# EAGLE board comb (EAGLE 9.6.2), part 1 of 2
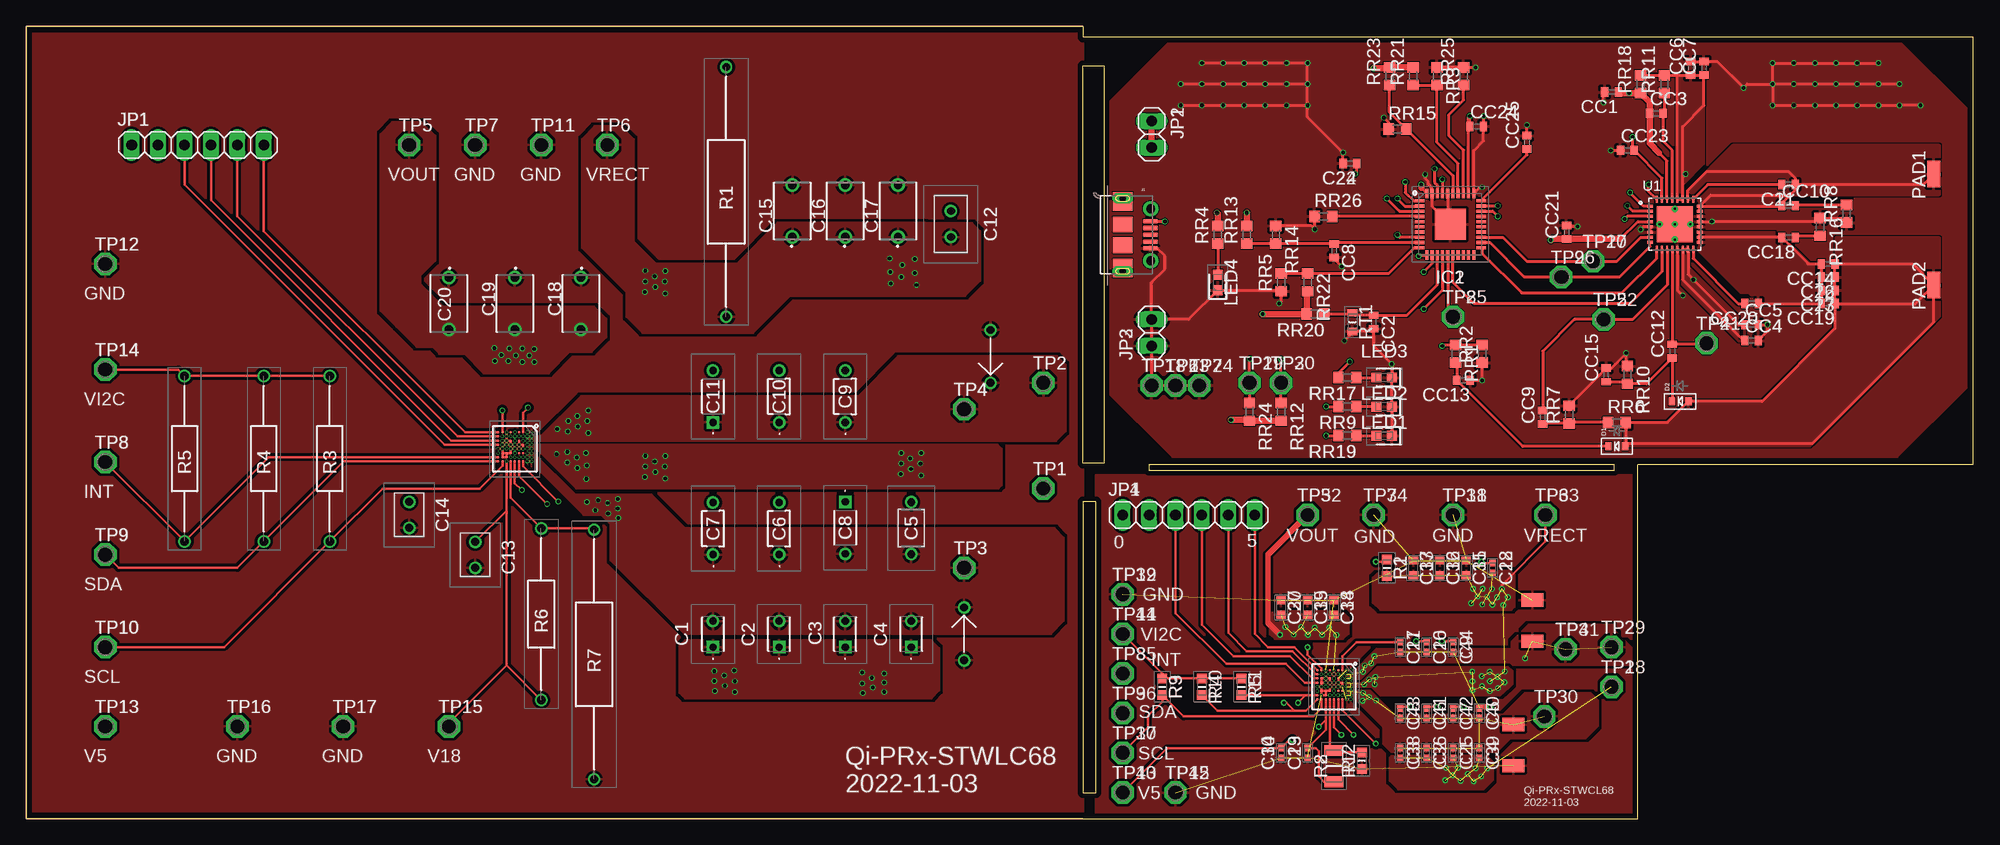
[diagram p0: board, top side]
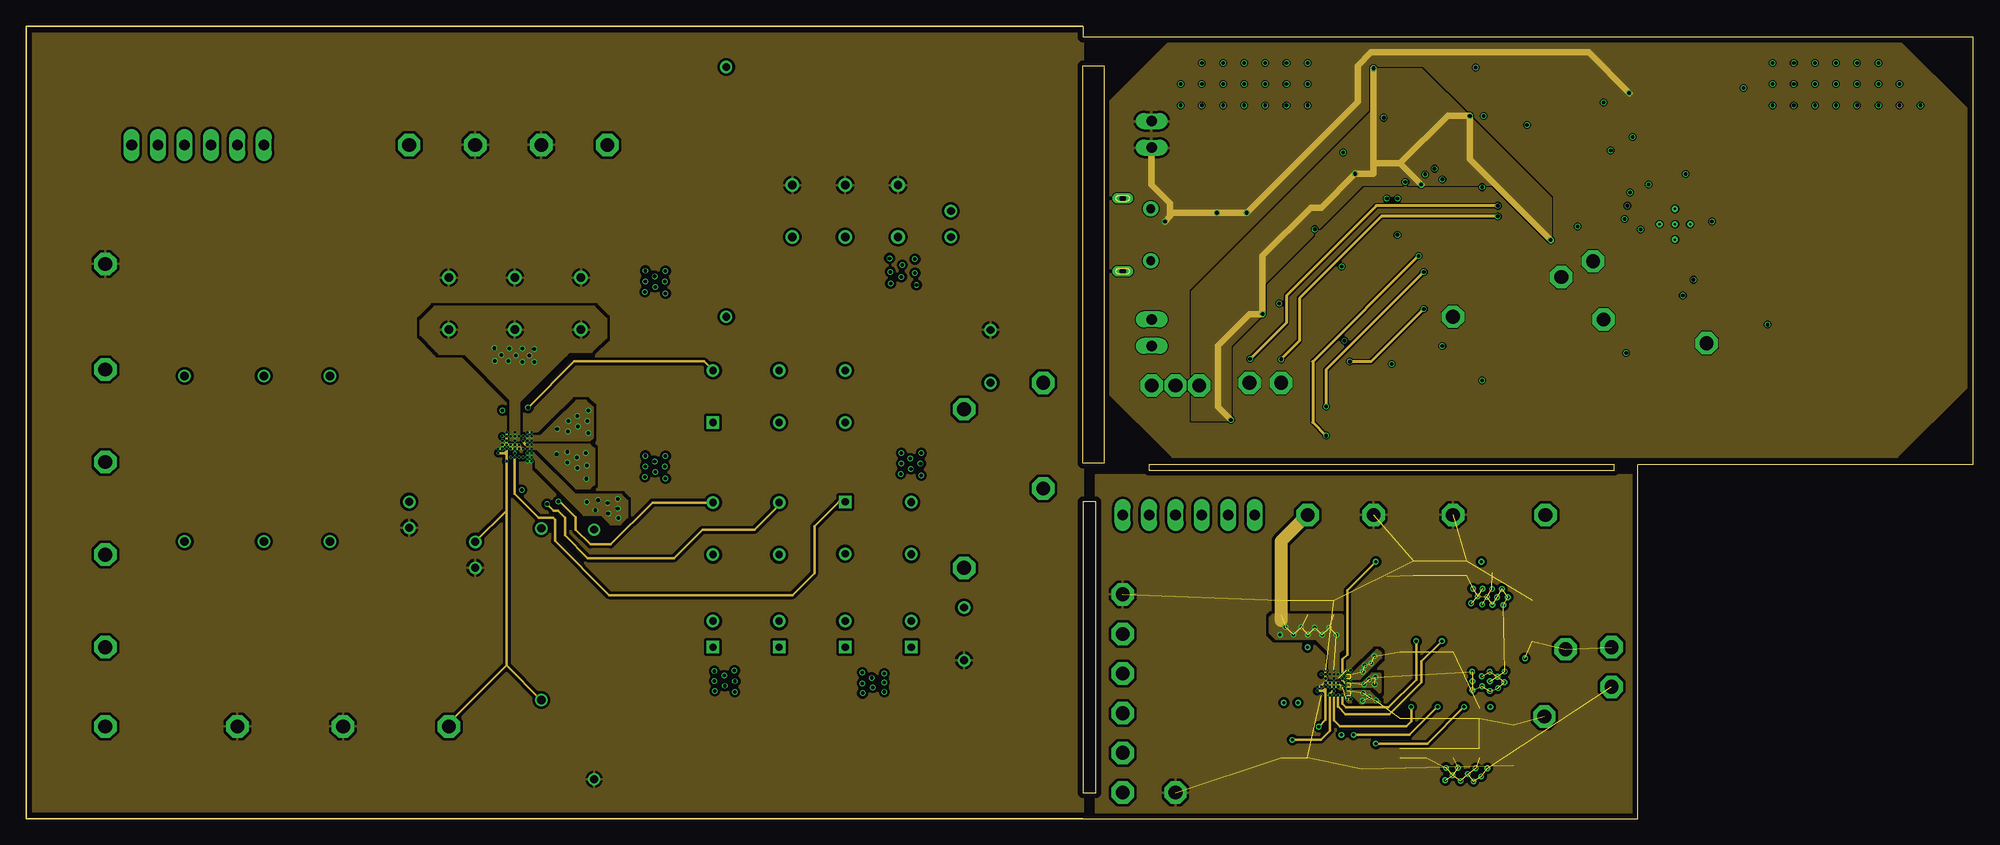
[diagram p1: board, inner layer Route2]
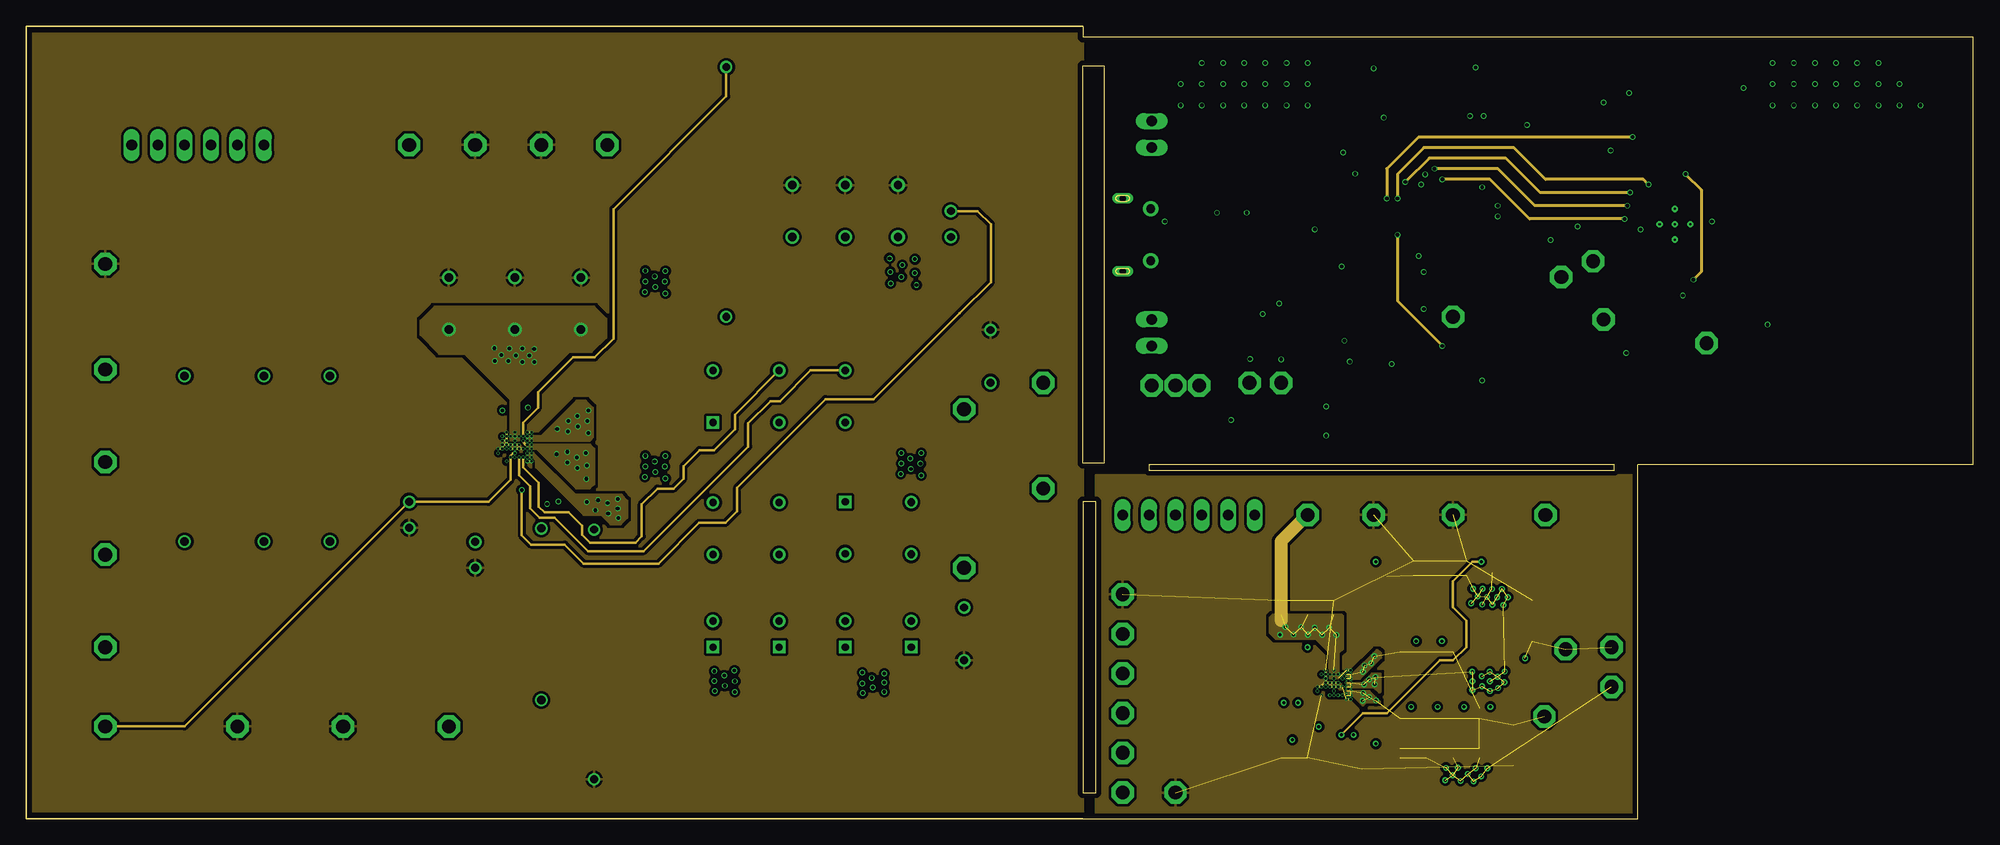
[diagram p2: board, inner layer Route15]
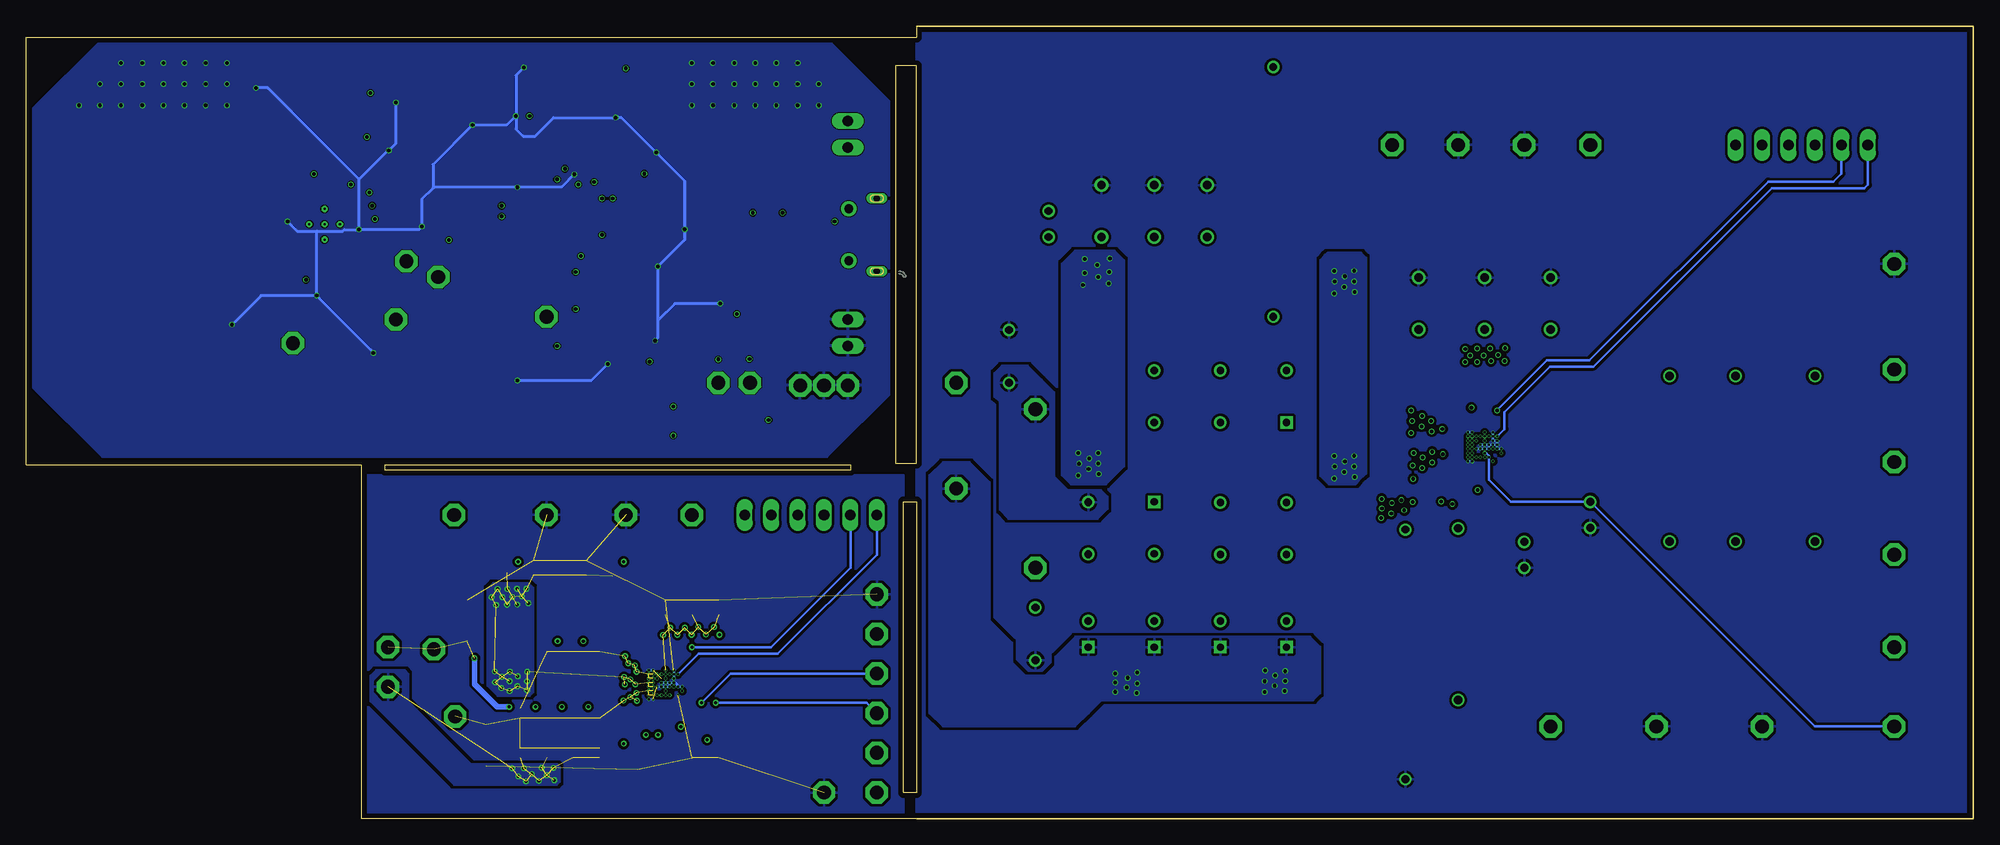
[diagram p3: board, bottom side, seen from below]

Size 187.2 x 76.2 mm. Coordinates in mm from the lower left corner, seen from the top.
Outline: 0,0 0,76.2 101.6,76.2 101.6,75.13 187.2,75.13 187.2,34.04 154.94,34.04 154.94,0 101.6,0 0,0
Outline: 152.65,34.04 107.95,34.04 107.95,33.53 152.65,33.53 152.65,34.04
Outline: 101.6,2.54 102.87,2.54 102.87,30.48 101.6,30.48 101.6,2.54
Outline: 101.6,72.39 103.63,72.39 103.63,34.16 101.6,34.16 101.6,72.39
Copper layers (1+2*15+16): Top 0.0178mm / dielectric 12mil / Route2 0.0356mm / dielectric 28mil / Route15 0.0356mm / dielectric 12mil / Bottom 0.0178mm
Design rules "Qi-Rx": minimum track width 6mil, minimum drill 0.2mm, track to track 4mil, track to pad 4mil, pad to pad 4mil, via to via 4mil, smd to smd 4mil, copper to edge 20mil, drill to drill 4mil, minimum pad ring 8mil, minimum via ring 2mil, stop-mask expansion 3mil, vias tented up to drill 0mil, thermal gap 10mil

## Footprints (pad centres in the part's own frame; a part is rotated, then mirrored left to right if it is on the bottom)
K104K15X7RF5UL2 = drill 0.7 pad 1.2 square: 1 0,0 | drill 0.7 pad 1.2: 2 2.5,0
RCER71H104K0K1H03B = drill 0.75 pad 1.2: 1 -2.5,0; 2 2.5,0
K223K15X7RF53H5G = drill 0.7 pad 1.2: 1 0,0; 2 5,0
K473K15X0UH53H5H = drill 0.7 pad 1.2 square: 1 0,0 | drill 0.7 pad 1.2: 2 5,0
RCE5C1H104J2A2H03B = drill 0.75 pad 1.2: 1 0,0; 2 2.5,0
RHS7G2A182J1A2H01B = drill 0.75 pad 1.2: 1 0,0; 2 2.5,0
FG26 = drill 0.8 pad 1.3: 1 -2.5,0; 2 2.5,0
C0402 = smd 0.7 x 0.9: 1 -0.65,0; 2 0.65,0
CAPC1005X55N = smd 0.6 x 0.62: 1 -0.46,0; 2 0.46,0
CAPC1608X90N = smd 0.75 x 0.94: 1 -0.7,0; 2 0.7,0
SOD-523 = smd 0.8 x 0.6: A 0,-0.8; K 0,0.8
BGA72C40P9X9_441X376X58 = smd 0.242 x 0.242: A1 -1.6,1.6; A2 -1.2,1.6; A3 -0.8,1.6; A4 -0.4,1.6; A5 0,1.6; A6 0.4,1.6; A7 0.8,1.6; A8 1.2,1.6; B1 -1.6,1.2; B2 -1.2,1.2; B3 -0.8,1.2; B4 -0.4,1.2; B5 0,1.2; B6 0.4,1.2; B7 0.8,1.2; B8 1.2,1.2; C1 -1.6,0.8; C2 -1.2,0.8; C3 -0.8,0.8; C4 -0.4,0.8; C5 0,0.8; C6 0.4,0.8; C7 0.8,0.8; C8 1.2,0.8; D1 -1.6,0.4; D2 -1.2,0.4; D3 -0.8,0.4; D4 -0.4,0.4; D5 0,0.4; D6 0.4,0.4; D7 0.8,0.4; D8 1.2,0.4; E1 -1.6,0; E2 -1.2,0; E3 -0.8,0; E4 -0.4,0; E5 0,0; E6 0.4,0; E7 0.8,0; E8 1.2,0; F1 -1.6,-0.4; F2 -1.2,-0.4; F3 -0.8,-0.4; F4 -0.4,-0.4; F5 0,-0.4; F6 0.4,-0.4; F7 0.8,-0.4; F8 1.2,-0.4; G1 -1.6,-0.8; G2 -1.2,-0.8; G3 -0.8,-0.8; G4 -0.4,-0.8; G5 0,-0.8; G6 0.4,-0.8; G7 0.8,-0.8; G8 1.2,-0.8; H1 -1.6,-1.2; H2 -1.2,-1.2; H3 -0.8,-1.2; H4 -0.4,-1.2; H5 0,-1.2; H6 0.4,-1.2; H7 0.8,-1.2; H8 1.2,-1.2; J1 -1.6,-1.6; J2 -1.2,-1.6; J3 -0.8,-1.6; J4 -0.4,-1.6; J5 0,-1.6; J6 0.4,-1.6; J7 0.8,-1.6; J8 1.2,-1.6
QFN50P600X600X100-41N = smd 0.9 x 0.3: 1 -2.95,2.25; 2 -2.95,1.75; 3 -2.95,1.25; 4 -2.95,0.75; 5 -2.95,0.25; 6 -2.95,-0.25; 7 -2.95,-0.75; 8 -2.95,-1.25; 9 -2.95,-1.75; 10 -2.95,-2.25; 21 2.95,-2.25; 22 2.95,-1.75; 23 2.95,-1.25; 24 2.95,-0.75; 25 2.95,-0.25; 26 2.95,0.25; 27 2.95,0.75; 28 2.95,1.25; 29 2.95,1.75; 30 2.95,2.25 | smd 0.3 x 0.9: 11 -2.25,-2.95; 12 -1.75,-2.95; 13 -1.25,-2.95; 14 -0.75,-2.95; 15 -0.25,-2.95; 16 0.25,-2.95; 17 0.75,-2.95; 18 1.25,-2.95; 19 1.75,-2.95; 20 2.25,-2.95; 31 2.25,2.95; 32 1.75,2.95; 33 1.25,2.95; 34 0.75,2.95; 35 0.25,2.95; 36 -0.25,2.95; 37 -0.75,2.95; 38 -1.25,2.95; 39 -1.75,2.95; 40 -2.25,2.95 | smd 3 x 3: 41 0,0
MOLEX_105017-0001 = smd 0.4 x 1.35: 1 -1.3,2.675; 2 -0.65,2.675; 3 0,2.675; 4 0.65,2.675; 5 1.3,2.675 | drill 0.85 pad 1.45: P$1 -2.5,2.7; P$2 2.5,2.7 | smd 1.5 x 1.9: P$8 -1,0; P$9 1,0 | smd 1.8 x 1.9: P$10 -3.2,0; P$11 3.2,0 | drill 0.6 pad 0.8 long: P$12 -3.5,0; P$13 3.5,0
1X06 = drill 1.016 long: 1 -6.35,0; 2 -3.81,0; 3 -1.27,0; 4 1.27,0; 5 3.81,0; 6 6.35,0
1X02 = drill 1.016 long: 1 -1.27,0; 2 1.27,0
LEDC1608X80N = smd 0.95 x 0.95: 1 -0.75,0; 2 0.75,0
SMD1,27-2,54 = smd 1.27 x 2.54: 1 0,0
RESAD2400W54L1000D350 = drill 0.75 pad 1.15: 1 0,0; 2 24,0
RESC1608X55N = smd 0.9 x 0.95: 1 -0.8,0; 2 0.8,0
RESAD1590W60L630D240 = drill 0.8 pad 1.2: 1 0,0; 2 15.9,0
RESAD1650W60L650D250 = drill 0.8 pad 1.2: 1 0,0; 2 16.5,0
RESC3216X60N = smd 1.05 x 1.8: 1 -1.5,0; 2 1.5,0
R0603 = smd 1 x 1.1: 1 -0.85,0; 2 0.85,0
THRMC1608X90N = smd 0.7 x 0.95: 1 -0.9,0; 2 0.9,0
P1-13 = drill 1.321 pad 2.159 octagon: TP 0,0
IC_ADS125H01IRHBT = smd 0.6 x 0.25: 1 -2.4,1.75; 2 -2.4,1.25; 3 -2.4,0.75; 4 -2.4,0.25; 5 -2.4,-0.25; 6 -2.4,-0.75; 7 -2.4,-1.25; 8 -2.4,-1.75; 17 2.4,-1.75; 18 2.4,-1.25; 19 2.4,-0.75; 20 2.4,-0.25; 21 2.4,0.25; 22 2.4,0.75; 23 2.4,1.25; 24 2.4,1.75 | smd 0.25 x 0.6: 9 -1.75,-2.4; 10 -1.25,-2.4; 11 -0.75,-2.4; 12 -0.25,-2.4; 13 0.25,-2.4; 14 0.75,-2.4; 15 1.25,-2.4; 16 1.75,-2.4; 25 1.75,2.4; 26 1.25,2.4; 27 0.75,2.4; 28 0.25,2.4; 29 -0.25,2.4; 30 -0.75,2.4; 31 -1.25,2.4; 32 -1.75,2.4 | smd 3.45 x 3.45: 33 0,0 | drill 0.2 pad 0.4: 34 0,0; 35 0,1.475; 36 -1.475,0; 37 0,-1.475; 38 1.475,0
SA16A-E3/54 = drill 0.75 pad 1.2: P$1 -2.54,0; P$2 2.54,0
SMAJ16A = smd 1.27 x 2.1: P$1 -1.985,0; P$2 1.985,0

## Placement (x,y rotation side)
C1  K104K15X7RF5UL2  [K104K15X7RF5UL2]  66.04,16.51 90 top
C2  K104K15X7RF5UL2  [K104K15X7RF5UL2]  72.39,16.51 90 top
C3  K104K15X7RF5UL2  [K104K15X7RF5UL2]  78.74,16.51 90 top
C4  K104K15X7RF5UL2  [K104K15X7RF5UL2]  85.09,16.51 90 top
C5  RCE5C1H392J0K1H03B  [RCER71H104K0K1H03B]  85.09,27.94 270 top
C6  K223K15X7RF53H5G  [K223K15X7RF53H5G]  72.39,25.4 90 top
C7  K223K15X7RF53H5G  [K223K15X7RF53H5G]  66.04,25.4 90 top
C8  K473K15X0UH53H5H  [K473K15X0UH53H5H]  78.74,30.48 270 top
C9  K223K15X7RF53H5G  [K223K15X7RF53H5G]  78.74,38.1 90 top
C10  K223K15X7RF53H5G  [K223K15X7RF53H5G]  72.39,38.1 90 top
C11  K473K15X0UH53H5H  [K473K15X0UH53H5H]  66.04,38.1 90 top
C12  RDE5C2J472J2K1H03B  [RCE5C1H104J2A2H03B]  88.9,58.42 270 top
C13  RHS7G2A222J1DGH01A  [RHS7G2A182J1A2H01B]  43.18,24.13 90 top
C14  RHS7G2A222J1DGH01A  [RHS7G2A182J1A2H01B]  36.83,30.48 270 top
C15  FG26X7R1E106KRT06  [FG26]  73.66,58.42 90 top
C16  FG26X7R1E106KRT06  [FG26]  78.74,58.42 90 top
C17  FG26X7R1E106KRT06  [FG26]  83.82,58.42 90 top
C18  FG26X7R1E106KRT06  [FG26]  53.34,49.53 270 top
C19  FG26X7R1E106KRT06  [FG26]  46.99,49.53 270 top
C20  FG26X7R1E106KRT06  [FG26]  40.64,49.53 270 top
C21  0.1u  [C0402]  169.42,60.96 180 top
C22  0.1u  [C0402]  173.23,52.07 180 top
C23  0.1u  [C0402]  173.23,50.8 180 top
C24  0.1u  [C0402]  127.25,62.99 180 top
C25  GCM155R71H104KE02D  [CAPC1005X55N]  137.16,6.35 90 top
C26  GRM155R71H223KA12D  [CAPC1005X55N]  134.62,16.51 90 top
C27  GRM155R71H473KE14D  [CAPC1005X55N]  132.08,16.51 90 top
C28  GCM155R71H472KA37D  [CAPC1005X55N]  140.97,24.13 270 top
C29  GRM155R61E225KE11D  [CAPC1005X55N]  123.19,6.35 270 top
C30  GRM155R61E225KE11D  [CAPC1005X55N]  120.65,6.35 270 top
C31  GRM188R61E106MA73D  [CAPC1608X90N]  138.43,24.13 90 top
C32  GRM188R61E106MA73D  [CAPC1608X90N]  135.89,24.13 90 top
C33  GRM188R61E106MA73D  [CAPC1608X90N]  133.35,24.13 90 top
C34  GRM188R61E106MA73D  [CAPC1608X90N]  125.73,20.32 90 top
C35  GRM188R61E106MA73D  [CAPC1608X90N]  123.19,20.32 90 top
C36  GCM155R71H104KE02D  [CAPC1005X55N]  134.62,6.35 90 top
C37  GRM188R61E106MA73D  [CAPC1608X90N]  120.65,20.32 90 top
C38  GCM155R71H104KE02D  [CAPC1005X55N]  132.08,6.35 90 top
C39  GCM155R71H104KE02D  [CAPC1005X55N]  139.7,6.35 90 top
C40  GRM155R71H392KA01D  [CAPC1005X55N]  139.7,10.16 270 top
C41  GRM155R71H223KA12D  [CAPC1005X55N]  134.62,10.16 90 top
C42  GRM155R71H223KA12D  [CAPC1005X55N]  137.16,10.16 90 top
C43  GRM155R71H473KE14D  [CAPC1005X55N]  132.08,10.16 270 top
C44  GRM155R71H223KA12D  [CAPC1005X55N]  137.16,16.51 90 top
CC1  [C0402]  152.4,69.85 180 top
CC2  0.1u  [C0402]  129.54,47.75 270 top
CC3  2.2u  [C0402]  156.72,67.82 0 top
CC4  22u  [C0402]  165.86,45.97 0 top
CC5  0.1u  [C0402]  165.86,47.5 0 top
CC6  22u  [C0402]  160.02,72.14 90 top
CC7  0.1u  [C0402]  161.29,72.14 90 top
CC8  0.1u  [C0402]  125.73,54.61 270 top
CC9  1000p  [C0402]  145.8,38.61 90 top
CC10  0.047u  [C0402]  169.42,58.93 0 top
CC12  0.22u  [C0402]  158.24,44.96 90 top
CC13  0.22u  [C0402]  138.18,42.16 180 top
CC14  0.1u  [C0402]  173.23,53.34 180 top
CC15  2700p  [C0402]  151.89,42.67 90 top
CC18  0.047u  [C0402]  169.42,55.88 180 top
CC19  0.1u  [C0402]  173.23,49.53 180 top
CC20  0.1u  [C0402]  165.86,49.53 180 top
CC21  2.2u  [C0402]  148.08,56.39 90 top
CC23  0.1u  [C0402]  153.92,64.26 0 top
CC24  0.1u  [C0402]  139.45,66.55 0 top
CC25  0.47u  [C0402]  144.27,65.02 90 top
D1  [SOD-523]  152.91,35.81 90 top
D2  [SOD-523]  159,40.13 90 top
IC1  STWLC68JRH  [BGA72C40P9X9_441X376X58]  46.99,35.56 270 top
IC2  BQ500511ARHAR  [QFN50P600X600X100-41N]  136.91,57.15 0 top
IC3  STWLC68JRH  [BGA72C40P9X9_441X376X58]  125.73,12.7 270 top
J1  105017-0001  [MOLEX_105017-0001]  105.41,56.13 270 top
JP1  [1X06]  16.51,64.77 0 top
JP2  [1X02]  108.2,65.79 270 top
JP3  [1X02]  108.2,46.74 90 top
JP4  [1X06]  111.76,29.21 0 top
LED1  150060GS75000  [LEDC1608X80N]  130.56,36.83 180 top
LED2  150060GS75000  [LEDC1608X80N]  130.56,39.62 180 top
LED3  150060GS75000  [LEDC1608X80N]  130.56,42.42 180 top
LED4  150060GS75000  [LEDC1608X80N]  114.55,51.56 90 top
PAD1  [SMD1,27-2,54]  183.39,61.98 0 top
PAD2  [SMD1,27-2,54]  183.39,51.31 0 top
R1  EP1WS100RJ  [RESAD2400W54L1000D350]  67.31,48.26 90 top
R2  CRGP0603F100R  [RESC1608X55N]  130.81,24.13 90 top
R3  MFR-25FRF52-47K  [RESAD1590W60L630D240]  29.21,26.67 90 top
R4  MFR-25FRF52-47K  [RESAD1590W60L630D240]  22.86,26.67 90 top
R5  MFR-25FRF52-47K  [RESAD1590W60L630D240]  15.24,26.67 90 top
R6  MRS25000C5101FCT00  [RESAD1650W60L650D250]  49.53,11.43 90 top
R7  EP1WS100RJ  [RESAD2400W54L1000D350]  54.61,3.81 90 top
R8  CRCW12065K10FKEAC  [RESC3216X60N]  125.73,5.08 270 top
R9  CRGP0603F47K  [RESC1608X55N]  109.22,12.7 90 top
R10  CRGP0603F47K  [RESC1608X55N]  113.03,12.7 90 top
R11  CRGP0603F47K  [RESC1608X55N]  116.84,12.7 90 top
R12  CRGP0603F100R  [RESC1608X55N]  128.4,5.59 270 top
RR1  133K  [R0603]  137.41,44.7 270 top
RR2  7.5K  [R0603]  139.95,44.7 90 top
RR3  24.9k  [R0603]  135.64,71.37 270 top
RR4  [R0603]  114.55,56.13 90 top
RR5  80.6k  [R0603]  120.65,51.56 90 top
RR6  69.8k  [R0603]  152.91,38.1 0 top
RR7  10k  [R0603]  148.34,38.86 90 top
RR8  0.2  [R0603]  175.01,58.17 90 top
RR9  1k  [R0603]  127,39.62 180 top
RR10  499k  [R0603]  153.92,42.67 270 top
RR11  2  [R0603]  157.48,70.61 90 top
RR12  10K  [R0603]  120.65,39.12 270 top
RR13  76.8k  [R0603]  117.35,56.13 90 top
RR14  10k  [R0603]  120.14,56.13 270 top
RR15  100k  [R0603]  131.83,66.29 0 top
RR16  0.2  [R0603]  172.47,56.9 270 top
RR17  1k  [R0603]  127,42.42 180 top
RR18  0.02  [R0603]  155.19,70.61 90 top
RR19  1k  [R0603]  127,36.83 180 top
RR20  10k  [R0603]  123.95,48.51 180 top
RR21  100k  [R0603]  133.35,71.37 90 top
RR22  100k  [R0603]  123.19,51.56 270 top
RR23  200k  [R0603]  131.06,71.37 90 top
RR24  10K  [R0603]  117.6,39.12 270 top
RR25  10k  [R0603]  138.18,71.37 90 top
RR26  10k  [R0603]  124.71,57.91 0 top
RT1  NTCG163JF103FT1  [THRMC1608X90N]  127.51,47.75 90 top
TP1  TPPAD1-13  [P1-13]  97.79,31.75 0 top
TP2  TPPAD1-13  [P1-13]  97.79,41.91 0 top
TP3  TPPAD1-13  [P1-13]  90.17,24.13 0 top
TP4  TPPAD1-13  [P1-13]  90.17,39.37 0 top
TP5  TPPAD1-13  [P1-13]  36.83,64.77 0 top
TP6  TPPAD1-13  [P1-13]  55.88,64.77 0 top
TP7  TPPAD1-13  [P1-13]  43.18,64.77 0 top
TP8  TPPAD1-13  [P1-13]  7.62,34.29 0 top
TP9  TPPAD1-13  [P1-13]  7.62,25.4 0 top
TP10  TPPAD1-13  [P1-13]  7.62,16.51 0 top
TP11  TPPAD1-13  [P1-13]  49.53,64.77 0 top
TP12  TPPAD1-13  [P1-13]  7.62,53.34 0 top
TP13  TPPAD1-13  [P1-13]  7.62,8.89 0 top
TP14  TPPAD1-13  [P1-13]  7.62,43.18 0 top
TP15  TPPAD1-13  [P1-13]  40.64,8.89 0 top
TP16  TPPAD1-13  [P1-13]  20.32,8.89 0 top
TP17  TPPAD1-13  [P1-13]  30.48,8.89 0 top
TP18  TPPAD1-13  [P1-13]  108.2,41.66 0 top
TP19  TPPAD1-13  [P1-13]  117.6,41.91 0 top
TP20  TPPAD1-13  [P1-13]  120.65,41.91 0 top
TP21  TPPAD1-13  [P1-13]  161.54,45.72 0 top
TP22  TPPAD1-13  [P1-13]  151.64,48.01 0 top
TP23  TPPAD1-13  [P1-13]  110.49,41.66 0 top
TP24  TPPAD1-13  [P1-13]  112.78,41.66 0 top
TP25  TPPAD1-13  [P1-13]  137.16,48.26 0 top
TP26  TPPAD1-13  [P1-13]  147.57,52.07 0 top
TP27  TPPAD1-13  [P1-13]  150.62,53.59 0 top
TP28  TPPAD1-13  [P1-13]  152.4,12.7 0 top
TP29  TPPAD1-13  [P1-13]  152.4,16.51 0 top
TP30  TPPAD1-13  [P1-13]  145.95,9.86 0 top
TP31  TPPAD1-13  [P1-13]  147.98,16.31 0 top
TP32  TPPAD1-13  [P1-13]  123.19,29.21 0 top
TP33  TPPAD1-13  [P1-13]  146.05,29.21 0 top
TP34  TPPAD1-13  [P1-13]  129.54,29.21 0 top
TP35  TPPAD1-13  [P1-13]  105.41,13.97 0 top
TP36  TPPAD1-13  [P1-13]  105.41,10.16 0 top
TP37  TPPAD1-13  [P1-13]  105.41,6.35 0 top
TP38  TPPAD1-13  [P1-13]  137.16,29.21 0 top
TP39  TPPAD1-13  [P1-13]  105.41,21.59 0 top
TP40  TPPAD1-13  [P1-13]  105.41,2.54 0 top
TP41  TPPAD1-13  [P1-13]  105.41,17.78 0 top
TP42  TPPAD1-13  [P1-13]  110.49,2.54 0 top
U1  BQ50002ARHBR  [IC_ADS125H01IRHBT]  158.5,57.15 0 top
U$1  SA16A-E3/54  [SA16A-E3/54]  90.17,17.78 90 top
U$2  SA16A-E3/54  [SA16A-E3/54]  92.71,44.45 270 top
U$3  SMAJ16A  [SMAJ16A]  142.98,7.09 90 top
U$4  SMAJ16A  [SMAJ16A]  144.78,19.05 270 top

## Library data of the parts
C1-C4 = SamacSys_Parts; DESCRIPTION: Cap Ceramic 0.1uF 50V X7R 10% Radial 2.5mm 125C Ammo; HEIGHT: 5.4mm; MANUFACTURER_NAME: Vishay; MANUFACTURER_PART_NUMBER: K104K15X7RF5UL2; MOUSER_PART_NUMBER: 594-K104K15X7RF5UL2; MOUSER_PRICE-STOCK: https://www.mouser.co.uk/ProductDetail/Vishay-BC-Components/K104K15X7RF5UL2?qs=rLgk8CAOBHbCqsnkGO2HJA%3D%3D
C5 = SamacSys_Parts; DESCRIPTION: Capacitor L=3.6mm W=3.5mm T=2.5mm; HEIGHT: 5mm; MANUFACTURER_NAME: Murata Electronics; MANUFACTURER_PART_NUMBER: RCE5C1H392J0K1H03B
C6 C7 C9 C10 = SamacSys_Parts; DESCRIPTION: Multilayer Ceramic Capacitors MLCC - Leaded 50V 22nF 10% X7R e3 Auto; HEIGHT: 6.4mm; MANUFACTURER_NAME: Vishay; MANUFACTURER_PART_NUMBER: K223K15X7RF53H5G; MOUSER_PART_NUMBER: 594-K223K15X7RF53H5G; MOUSER_PRICE-STOCK: https://www.mouser.co.uk/ProductDetail/Vishay-BC-Components/K223K15X7RF53H5G?qs=DPoM0jnrROXnwHVP6zMfDA%3D%3D
C8 C11 = SamacSys_Parts; DESCRIPTION: Vishay K473K15X0UH53H5H 47nF Multilayer Ceramic Capacitor MLCC 100V dc +/-10% Tolerance Through Hole; HEIGHT: 6.4mm; MANUFACTURER_NAME: Vishay; MANUFACTURER_PART_NUMBER: K473K15X0UH53H5H; MOUSER_PART_NUMBER: 594-K473K15X0UH53H5H; MOUSER_PRICE-STOCK: https://www.mouser.co.uk/ProductDetail/Vishay-BC-Components/K473K15X0UH53H5H?qs=HxuBozqkfXB1XV2ITKZqsg%3D%3D
C12 = SamacSys_Parts; DESCRIPTION: Capacitor L=5.5mm W=4.0mm T=3.15mm; HEIGHT: 5.5mm; MANUFACTURER_NAME: Murata Electronics; MANUFACTURER_PART_NUMBER: RDE5C2J472J2K1H03B; MOUSER_PART_NUMBER: 81-RDE5C2J472J2K1H3B; MOUSER_PRICE-STOCK: https://www.mouser.co.uk/ProductDetail/Murata-Electronics/RDE5C2J472J2K1H03B?qs=B6kkDfuK7%2FDo49LMQH5C1A%3D%3D
C13 C14 = SamacSys_Parts; DESCRIPTION: Capacitor L=4.2mm W=3.5mm T=2.8mm; HEIGHT: 5.5mm; MANUFACTURER_NAME: Murata Electronics; MANUFACTURER_PART_NUMBER: RHS7G2A222J1DGH01A; MOUSER_PART_NUMBER: 81-RHS7G2A222J1DGH1A; MOUSER_PRICE-STOCK: https://www.mouser.com/Search/Refine.aspx?Keyword=81-RHS7G2A222J1DGH1A
C15-C20 = SamacSys_Parts; DESCRIPTION: MLCC with Dipped Radial Lead, Capacitance=10?F, LxWxT:5.5x6x3.5mm, Lead pitch:5mm; HEIGHT: 6mm; MANUFACTURER_NAME: TDK; MANUFACTURER_PART_NUMBER: FG26X7R1E106KRT06; MOUSER_PART_NUMBER: 810-FG26X7R1E106KRT6; MOUSER_PRICE-STOCK: https://www.mouser.co.uk/ProductDetail/TDK/FG26X7R1E106KRT06?qs=qf2ddTMq67Uj8zbJHhN20w%3D%3D
C21-C24 CC1-CC10 CC12-CC15 CC18-CC21 CC23-CC25 D1 D2 RR1-RR26 = adafruit
C25 C36 C38 C39 = SamacSys_Parts; DESCRIPTION: Multilayer Ceramic Capacitors MLCC - SMD/SMT 0402 0.1uF 50volts X7R 10%; HEIGHT: 0.55mm; MANUFACTURER_NAME: Murata Electronics; MANUFACTURER_PART_NUMBER: GCM155R71H104KE02D; MOUSER_PART_NUMBER: 81-GCM155R71H104KE2D; MOUSER_PRICE-STOCK: https://www.mouser.co.uk/ProductDetail/Murata-Electronics/GCM155R71H104KE02D?qs=hNud%2FORuBR2sLZsqfoz4Fw%3D%3D
C26 C41 C42 C44 = SamacSys_Parts; DESCRIPTION: Ceramic SMT capacitor 22nF 50Vdc Murata 0402 GRM 22nF Ceramic Multilayer Capacitor, 50 V dc, +125??C, X7R Dielectric, ??10%; HEIGHT: 0.55mm; MANUFACTURER_NAME: Murata Electronics; MANUFACTURER_PART_NUMBER: GRM155R71H223KA12D; MOUSER_PART_NUMBER: 81-GRM155R71H223KA12; MOUSER_PRICE-STOCK: https://www.mouser.co.uk/ProductDetail/Murata-Electronics/GRM155R71H223KA12D?qs=Dfh4SrgScWyE65FKEkixtw%3D%3D
C27 C43 = SamacSys_Parts; DESCRIPTION: Multilayer Ceramic Capacitors MLCC - SMD/SMT 0402 0.047uF 50volts X7R 10%; HEIGHT: 0.55mm; MANUFACTURER_NAME: Murata Electronics; MANUFACTURER_PART_NUMBER: GRM155R71H473KE14D; MOUSER_PART_NUMBER: 81-GRM155R71H473KE4D; MOUSER_PRICE-STOCK: https://www.mouser.co.uk/ProductDetail/Murata-Electronics/GRM155R71H473KE14D?qs=hNud%2FORuBR2vKzdiNqYthQ%3D%3D
C28 = SamacSys_Parts; DESCRIPTION: Murata 0402 GCM 4.7nF Ceramic Multilayer Capacitor, 50 V dc, +125C, X7R Dielectric, +/-10% SMD; HEIGHT: 0.55mm; MANUFACTURER_NAME: Murata Electronics; MANUFACTURER_PART_NUMBER: GCM155R71H472KA37D; MOUSER_PART_NUMBER: 81-GCM155R71H472K37D; MOUSER_PRICE-STOCK: https://www.mouser.co.uk/ProductDetail/Murata-Electronics/GCM155R71H472KA37D?qs=QDXoN8f0aYJi%2FpaJLEInpw%3D%3D
C29 C30 = SamacSys_Parts; DESCRIPTION: Multilayer Ceramic Capacitors MLCC - SMD/SMT 0402 2.2uF 25volts X5R 10%; HEIGHT: 0.55mm; MANUFACTURER_NAME: Murata Electronics; MANUFACTURER_PART_NUMBER: GRM155R61E225KE11D; MOUSER_PART_NUMBER: 81-GRM155R61E225KE1D; MOUSER_PRICE-STOCK: https://www.mouser.co.uk/ProductDetail/Murata-Electronics/GRM155R61E225KE11D?qs=eeBpzGFlv%252B8X58bIUndZvA%3D%3D
C31-C35 C37 = SamacSys_Parts; DESCRIPTION: Multilayer Ceramic Capacitors MLCC - SMD/SMT 0603 10uF 25volts X5R 20%; HEIGHT: 0.9mm; MANUFACTURER_NAME: Murata Electronics; MANUFACTURER_PART_NUMBER: GRM188R61E106MA73D; MOUSER_PART_NUMBER: 81-GRM188R61E106MA3D; MOUSER_PRICE-STOCK: https://www.mouser.co.uk/ProductDetail/Murata-Electronics/GRM188R61E106MA73D?qs=PoXZt%252B2CjACpktoD15Kv0Q%3D%3D
C40 = SamacSys_Parts; DESCRIPTION: Murata 0402 GRM 3.9nF Ceramic Multilayer Capacitor, 50 V dc, +125C, X7R Dielectric, +/-10%; HEIGHT: 0.55mm; MANUFACTURER_NAME: Murata Electronics; MANUFACTURER_PART_NUMBER: GRM155R71H392KA01D; MOUSER_PART_NUMBER: 81-GRM15R71H392KA01D; MOUSER_PRICE-STOCK: https://www.mouser.co.uk/ProductDetail/Murata-Electronics/GRM155R71H392KA01D?qs=sT7emLDNC7UjNLZb6dRgiw%3D%3D
IC1 IC3 = SamacSys_Parts; DESCRIPTION: Wireless Charging ICs Qi-compliant inductive wireless power receiver for 5W applications; HEIGHT: 0.585mm; MANUFACTURER_NAME: STMicroelectronics; MANUFACTURER_PART_NUMBER: STWLC68JRH; MOUSER_PART_NUMBER: 511-STWLC68JRH; MOUSER_PRICE-STOCK: https://www.mouser.co.uk/ProductDetail/STMicroelectronics/STWLC68JRH?qs=GBLSl2AkirtnTJOZ01bmug%3D%3D
IC2 = BQ500511ARHAR; DESCRIPTION: Wireless Charging ICs Wireless Power Transmitter Controller 40-VQFN -40 to 85; HEIGHT: 1mm; MANUFACTURER_NAME: Texas Instruments; MANUFACTURER_PART_NUMBER: BQ500511ARHAR; MOUSER_PART_NUMBER: 595-BQ500511ARHAR; MOUSER_PRICE-STOCK: https://www.mouser.co.uk/ProductDetail/Texas-Instruments/BQ500511ARHAR?qs=LuYMPh7GGMTHLnf6Ooavlw%3D%3D
J1 = 105017-0001; AVAILABILITY: In Stock; DESCRIPTION: USB - micro B USB 2.0 Receptacle Connector 5 Position Surface Mount, Right Angle; Through Hole; MF: Molex; MP: 105017-0001; PACKAGE: None; PRICE: None; PURCHASE-URL: https://pricing.snapeda.com/search/part/105017-0001/?ref=eda
JP1-JP4 = pinhead
LED1-LED4 = 150060GS75000; DESCRIPTION: Wurth Elektronik WL-SMCW 520 nm Green LED, 1608 (0603) Clear SMD package; HEIGHT: 0.8mm; MANUFACTURER_NAME: Wurth Elektronik; MANUFACTURER_PART_NUMBER: 150060GS75000; MOUSER_PART_NUMBER: 710-150060GS75000; MOUSER_PRICE-STOCK: https://www.mouser.co.uk/ProductDetail/Wurth-Elektronik/150060GS75000?qs=LlUlMxKIyB0UYkq5lDO8nA%3D%3D
PAD1 PAD2 = wirepad
R1 R7 = SamacSys_Parts; DESCRIPTION: Res Wirewound 100 Ohm 5% 1W +/-300ppm/C Epoxy Resin AXL Ammo; HEIGHT: mm; MANUFACTURER_NAME: TE Connectivity; MANUFACTURER_PART_NUMBER: EP1WS100RJ; MOUSER_PART_NUMBER: 279-EP1WS100RJ; MOUSER_PRICE-STOCK: https://www.mouser.co.uk/ProductDetail/TE-Connectivity-Holsworthy/EP1WS100RJ?qs=IXkKOuu5vnHCFSAdn3AY7A%3D%3D
R2 R12 = SamacSys_Parts; DESCRIPTION: Thick Film Resistors - SMD CRGP 0603 100R 1% SMD Resistor; HEIGHT: 0.55mm; MANUFACTURER_NAME: TE Connectivity; MANUFACTURER_PART_NUMBER: CRGP0603F100R; MOUSER_PART_NUMBER: 279-CRGP0603F100R; MOUSER_PRICE-STOCK: https://www.mouser.co.uk/ProductDetail/TE-Connectivity-Holsworthy/CRGP0603F100R?qs=wUXugUrL1qxgC4nsawP%2FRA%3D%3D
R3-R5 = SamacSys_Parts; DESCRIPTION: Metal Film Resistors - Through Hole 47K OHM 1/4W 1%; HEIGHT: mm; MANUFACTURER_NAME: KEMET; MANUFACTURER_PART_NUMBER: MFR-25FRF52-47K; MOUSER_PART_NUMBER: 603-MFR-25FRF52-47K; MOUSER_PRICE-STOCK: https://www.mouser.co.uk/ProductDetail/YAGEO/MFR-25FRF52-47K?qs=oAGoVhmvjhz6e9IcIGQT0Q%3D%3D
R6 = SamacSys_Parts; DESCRIPTION: Vishay MRS25 Series Axial Thin Film Resistor 5.1k +/-1% 0.6W +/-50ppm/C; HEIGHT: mm; MANUFACTURER_NAME: Vishay; MANUFACTURER_PART_NUMBER: MRS25000C5101FCT00; MOUSER_PART_NUMBER: 594-MRS25000C5101FCT; MOUSER_PRICE-STOCK: https://www.mouser.com/Search/Refine.aspx?Keyword=594-MRS25000C5101FCT
R8 = SamacSys_Parts; DESCRIPTION: Thick Film Resistors - SMD 1/4Watt 5.1Kohms 1% Commercial Use; HEIGHT: 0.6mm; MANUFACTURER_NAME: Vishay; MANUFACTURER_PART_NUMBER: CRCW12065K10FKEAC; MOUSER_PART_NUMBER: 71-CRCW12065K10FKEAC; MOUSER_PRICE-STOCK: https://www.mouser.co.uk/ProductDetail/Vishay-Dale/CRCW12065K10FKEAC?qs=E3Y5ESvWgWNktrgtHh1MhA%3D%3D
R9-R11 = SamacSys_Parts; DESCRIPTION: 47k 0603 Thick Film Resistor +/-1% 0.25W CRGP0603F47K; HEIGHT: 0.55mm; MANUFACTURER_NAME: TE Connectivity; MANUFACTURER_PART_NUMBER: CRGP0603F47K; MOUSER_PART_NUMBER: 279-CRGP0603F47K; MOUSER_PRICE-STOCK: https://www.mouser.co.uk/ProductDetail/TE-Connectivity-Holsworthy/CRGP0603F47K?qs=wUXugUrL1qyWZ1Sw7fH%2FgQ%3D%3D
RT1 = NTCG163JF103FT1; DESCRIPTION: Chip NTC Thermistors (Sensor), Resistance (at 25?C)=10k?, Resistance Tolerance (at 25?C)=?1%; HEIGHT: 0.9mm; MANUFACTURER_NAME: TDK; MANUFACTURER_PART_NUMBER: NTCG163JF103FT1; MOUSER_PART_NUMBER: 810-NTCG163JF103FT1; MOUSER_PRICE-STOCK: https://www.mouser.co.uk/ProductDetail/TDK/NTCG163JF103FT1?qs=f0gCvUGw%252BIyUP%2FT8hD9VGA%3D%3D
TP1-TP42 = testpad
U1 = BQ50002ARHBR; AVAILABILITY: In Stock; DESCRIPTION: Low-Cost 5-V Wireless Power Transmitter AFE WPC V 1.2 A11 Transmitter 32-VQFN -40 to 125; MF: Texas Instruments; MP: BQ50002ARHBR; PACKAGE: VQFN-32 Texas Instruments; PRICE: None; PURCHASE-URL: https://pricing.snapeda.com/search/part/BQ50002ARHBR/?ref=eda
U$1-U$4 = SamacSys_Parts

## Nets
AC1: C1.2 C2.2 C3.2 C4.2 C5.2 C6.1 C7.1 C8.2 IC1.A6 IC1.A7 IC1.B6 IC1.B7 TP3.TP U$1.P$2
AC2: C5.1 C9.1 C10.1 C11.1 IC1.A2 IC1.A3 IC1.B2 IC1.B3 TP2.TP TP4.TP U$2.P$2
AC3: C25.2 C36.2 C38.2 C39.2 C40.2 C41.1 C42.1 C43.2 IC3.A6 IC3.A7 IC3.B6 IC3.B7 TP30.TP U$3.P$2
AC4: C26.1 C27.1 C40.1 C44.1 IC3.A2 IC3.A3 IC3.B2 IC3.B3 TP29.TP TP31.TP U$4.P$2
COIL1: C21.1 CC10.1 PAD1.1 U1.23 U1.24 U1.26
CSN: CC3.2 RR11.1 U1.29
FOD_CAL: IC2.10 RR5.2 RR22.1
FOD_THR: IC2.35 RR15.2 RR23.1
GND: C13.1 C14.2 C15.2 C16.2 C17.2 C18.1 C19.1 C20.1 IC1.A1 IC1.A8 IC1.B1 IC1.B8 IC1.C4 IC1.C5 IC1.D3 IC1.D4 IC1.D5 IC1.E4 IC1.E5 IC1.F3 IC1.F4 IC1.F5 IC1.F6 IC1.G1 IC1.G2 IC1.G3 IC1.G4 IC1.G6 IC1.G7 IC1.H3 IC1.H4 IC1.H5 IC1.H6 IC1.H7 IC1.J5 R7.1 TP7.TP TP11.TP TP12.TP TP16.TP TP17.TP U$1.P$1 U$2.P$1
GND1: C24.2 CC1.2 CC2.2 CC4.2 CC5.2 CC6.2 CC7.2 CC8.2 CC13.1 CC15.2 CC21.2 CC23.1 CC24.2 CC25.2 IC2.31 IC2.36 IC2.39 IC2.41 J1.5 JP3.1 JP3.2 LED1.1 LED2.1 LED3.1 LED4.1 RR2.1 RR3.1 RR5.1 RR7.2 RR8.1 RR10.1 RR14.1 RR15.1 RR16.1 RR25.2 RR26.1 RT1.1 TP18.TP TP23.TP TP24.TP U1.5 U1.6 U1.13 U1.20 U1.21 U1.22
GND2: C29.2 C30.2 C31.2 C32.2 C33.2 C34.2 C35.2 C37.2 IC3.A1 IC3.A8 IC3.B1 IC3.B8 IC3.C4 IC3.C5 IC3.D3 IC3.D4 IC3.D5 IC3.E4 IC3.E5 IC3.F3 IC3.F4 IC3.F5 IC3.F6 IC3.G1 IC3.G2 IC3.G3 IC3.G4 IC3.G6 IC3.G7 IC3.H3 IC3.H4 IC3.H5 IC3.H6 IC3.H7 IC3.J5 R12.2 TP34.TP TP38.TP TP39.TP TP42.TP U$3.P$1 U$4.P$1
GPIO0: IC1.H2 JP1.1
GPIO1: IC1.H1 JP1.2
GPIO2: IC1.J4 JP1.3
GPIO3: IC1.J3 JP1.4
GPIO4: IC1.J2 JP1.5
GPIO5: IC1.J1 JP1.6
GPIO6: IC3.H1 JP4.2
GPIO7: IC3.J1 JP4.6
GPIO8: IC3.J2 JP4.5
GPIO9: IC3.J3 JP4.4
GPIO10: IC3.J4 JP4.3
GPIO11: IC3.H2 JP4.1
INT: IC1.J7 R5.1 TP8.TP
INT1: IC3.J7 R11.1 TP35.TP
JTAG_CLK: IC2.19
JTAG_DATA: IC2.20
LED_MODE: IC2.34 RR3.2 RR21.1
N$1: C6.2 IC1.D8
N$2: C7.2 IC1.C8
N$3: C8.1 IC1.E7
N$4: C1.1 C2.1 C3.1 C4.1 TP1.TP
N$5: C11.2 IC1.C1
N$6: C10.2 IC1.C7
N$7: C9.2 IC1.D7
N$8: C12.1 IC1.E8
N$9: IC1.C2 R1.2
N$10: IC1.F8 R6.2 R7.2
N$11: R3.2 R4.2 R5.2 TP14.TP
N$12: CC12.2 TP21.TP U1.12
N$13: CC12.1 CC15.1 D2.K RR10.2
N$14: CC9.2 TP22.TP U1.11
N$15: CC9.1 RR6.1 RR7.1
N$16: CC13.2 D1.K RR1.2
N$17: CC4.1 CC5.1 CC6.1 CC7.1 RR11.2 RR18.2 U1.14 U1.15 U1.27 U1.28
N$18: C21.2 U1.25
N$19: CC10.2 RR8.2
N$20: C22.2 C23.2 CC14.2 CC18.2 CC19.2 CC20.1 U1.17 U1.18 U1.19
N$21: CC20.2 U1.16
N$22: CC18.1 RR16.2
N$23: CC25.1 IC2.30
N$24: IC2.15 TP25.TP
N$25: LED1.2 RR19.1
N$26: LED2.2 RR9.1
N$27: LED3.2 RR17.1
N$28: IC2.11 RR19.2
N$29: IC2.12 RR9.2
N$30: IC2.14 RR17.2
N$31: IC2.33 RR25.1
N$32: IC2.4 RR26.2
N$33: LED4.2 RR4.1
N$34: C41.2 IC3.D8
N$35: C42.2 IC3.C8
N$36: C43.1 IC3.E7
N$37: C25.1 C36.1 C38.1 C39.1 TP28.TP
N$38: C27.2 IC3.C1
N$39: C26.2 IC3.C7
N$40: C44.2 IC3.D7
N$41: C28.1 IC3.E8
N$42: IC3.C2 R2.2
N$43: IC3.F8 R8.1 R12.1
PEAK: IC2.8 RR1.1 RR2.2
SCL: IC1.H8 R3.1 TP10.TP
SCL1: IC2.29 RR24.1 TP19.TP
SCL2: IC3.H8 R9.1 TP37.TP
SDA: IC1.J8 R4.1 TP9.TP
SDA1: IC2.28 RR12.1 TP20.TP
SDA2: IC3.J8 R10.1 TP36.TP
TANK: C22.1 C23.1 CC14.1 CC19.1 D1.A D2.A PAD2.1 RR6.2
TSENSE: CC2.1 IC2.13 RR20.1 RT1.2
U1P1: IC2.1 U1.1
U1P2: IC2.38 U1.2
U1P3: IC2.37 U1.3
U1P7: IC2.23 TP27.TP U1.7
U1P8: IC2.22 TP26.TP U1.8
U1P9: IC2.21 U1.9
U1P10: IC2.16 U1.10
U1P31: CC23.2 IC2.3 U1.31
U1P32: IC2.2 U1.32
V1: C29.1 IC3.G5 IC3.G8 IC3.J6 R8.2
V2: C30.1 IC3.E6 IC3.F7 TP40.TP
V5: C14.1 IC1.E6 IC1.F7 TP13.TP
V18: C13.2 IC1.G5 IC1.G8 IC1.J6 R6.1 TP15.TP
VCC_3: C24.1 CC21.1 CC24.1 IC2.32 IC2.40 RR12.2 RR20.2 RR21.2 RR22.2 RR23.2 RR24.2 U1.4
VCC_5: CC1.1 CC3.1 J1.1 JP2.1 JP2.2 RR4.2 RR13.2 RR18.1 U1.30
VI2C: R9.2 R10.2 R11.2 TP41.TP
VOUT: C18.2 C19.2 C20.2 IC1.D2 IC1.E1 IC1.E2 IC1.E3 IC1.F2 TP5.TP
VOUT1: C34.1 C35.1 C37.1 IC3.D2 IC3.E1 IC3.E2 IC3.E3 IC3.F2 TP32.TP
VRECT: C12.2 C15.1 C16.1 C17.1 IC1.A4 IC1.A5 IC1.B4 IC1.B5 IC1.C3 R1.1 TP6.TP
VRECT1: C28.2 C31.1 C32.1 C33.1 IC3.A4 IC3.A5 IC3.B4 IC3.B5 IC3.C3 R2.1 TP33.TP
VSENSE: CC8.1 IC2.9 RR13.1 RR14.2